# Altium PCB Read Time sensor Tho AMT.PcbDoc
Units mil, origin at the board's own origin, x right, y up, seen from the top; angles counter-clockwise.
Board outline 3641.73 x 3425.2 mil, 2 copper layers (Top Layer, Bottom Layer); 48 components, 35 nets, 162 pads, 86 vias.
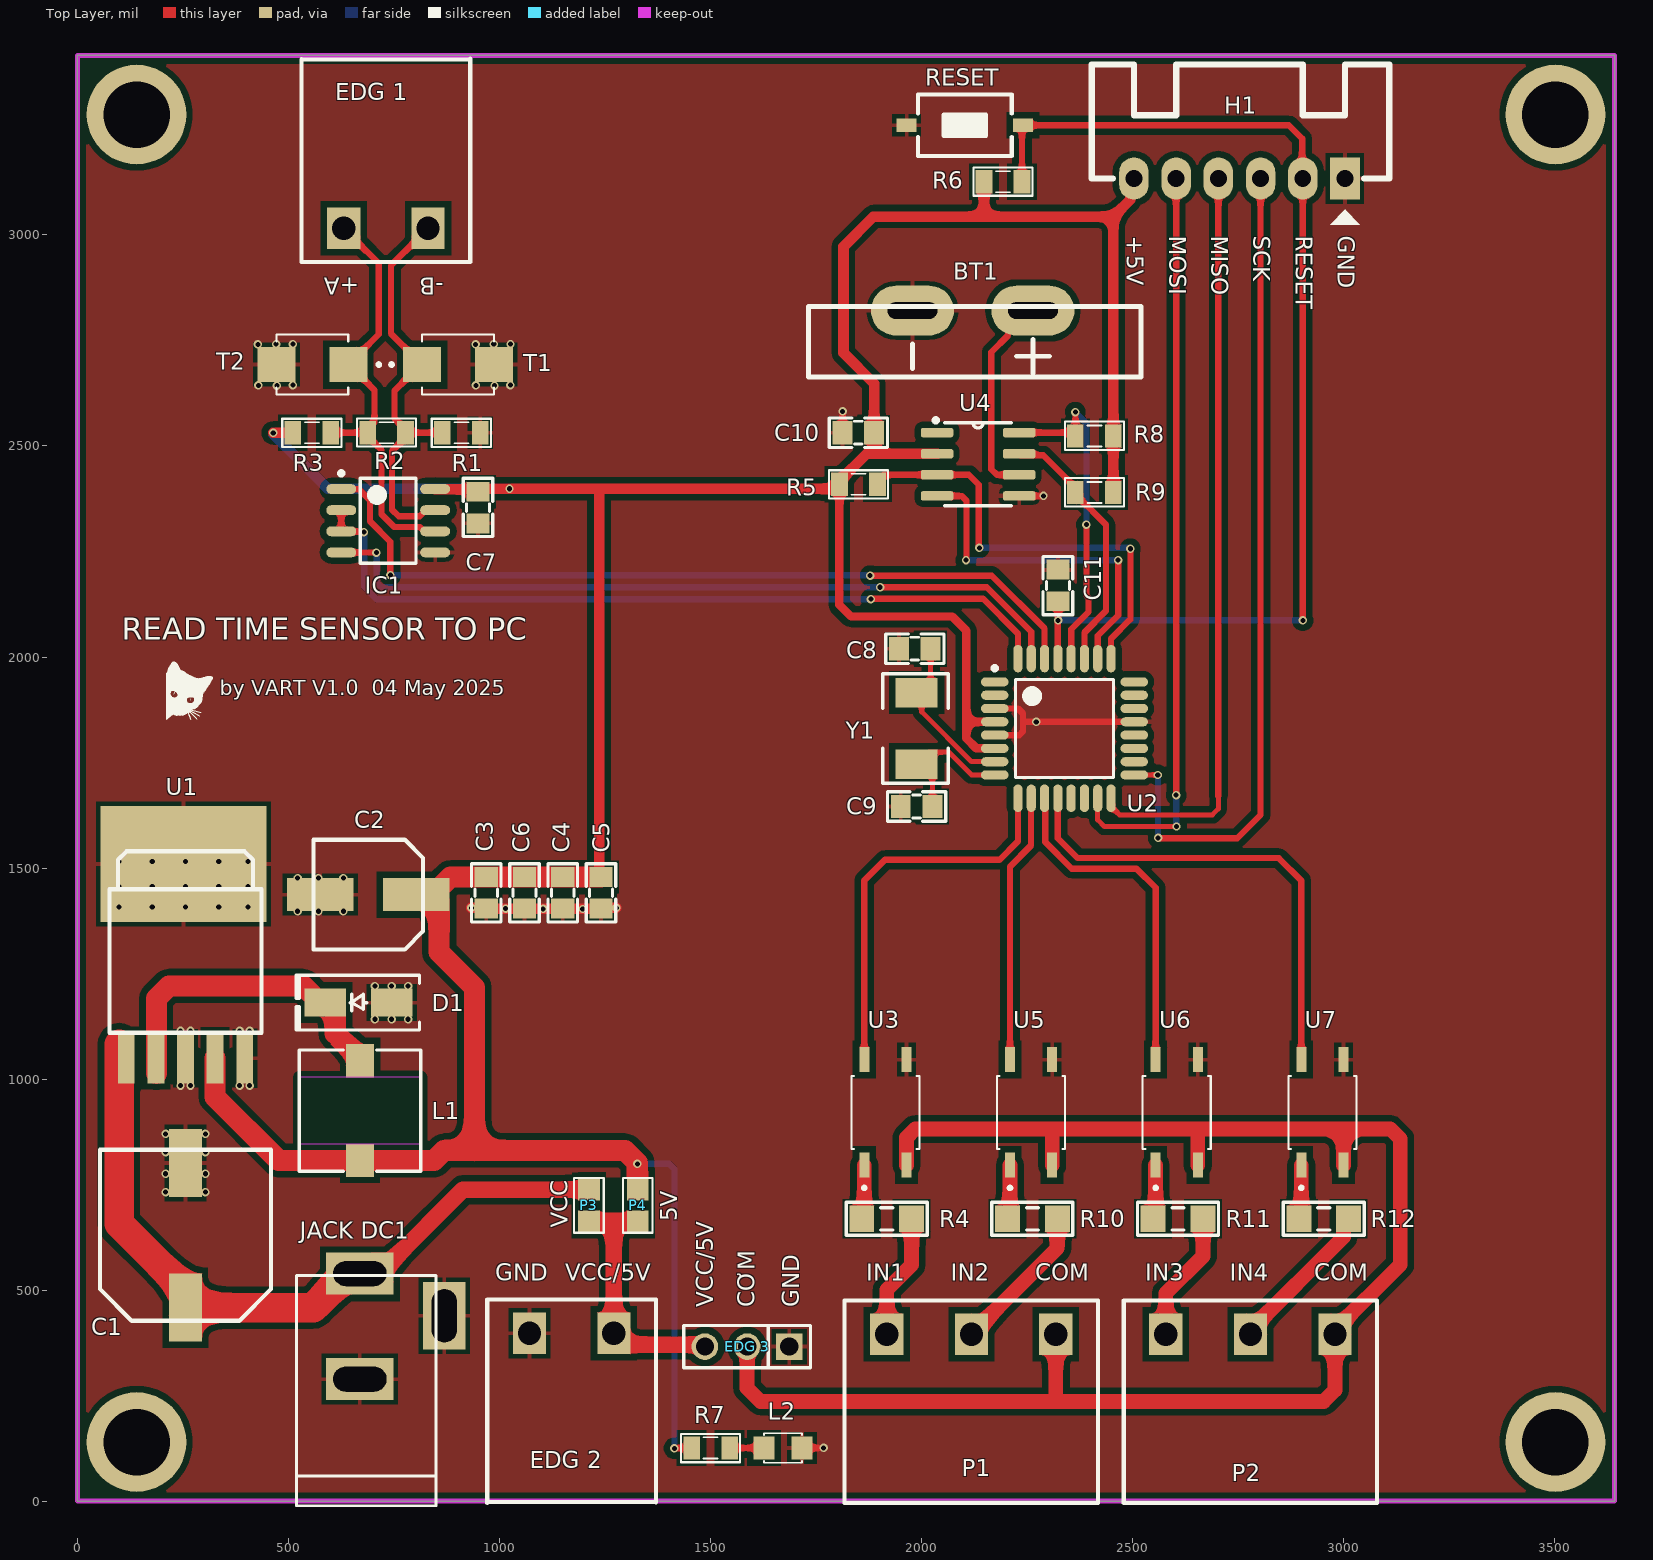
[diagram p0: Top Layer view]
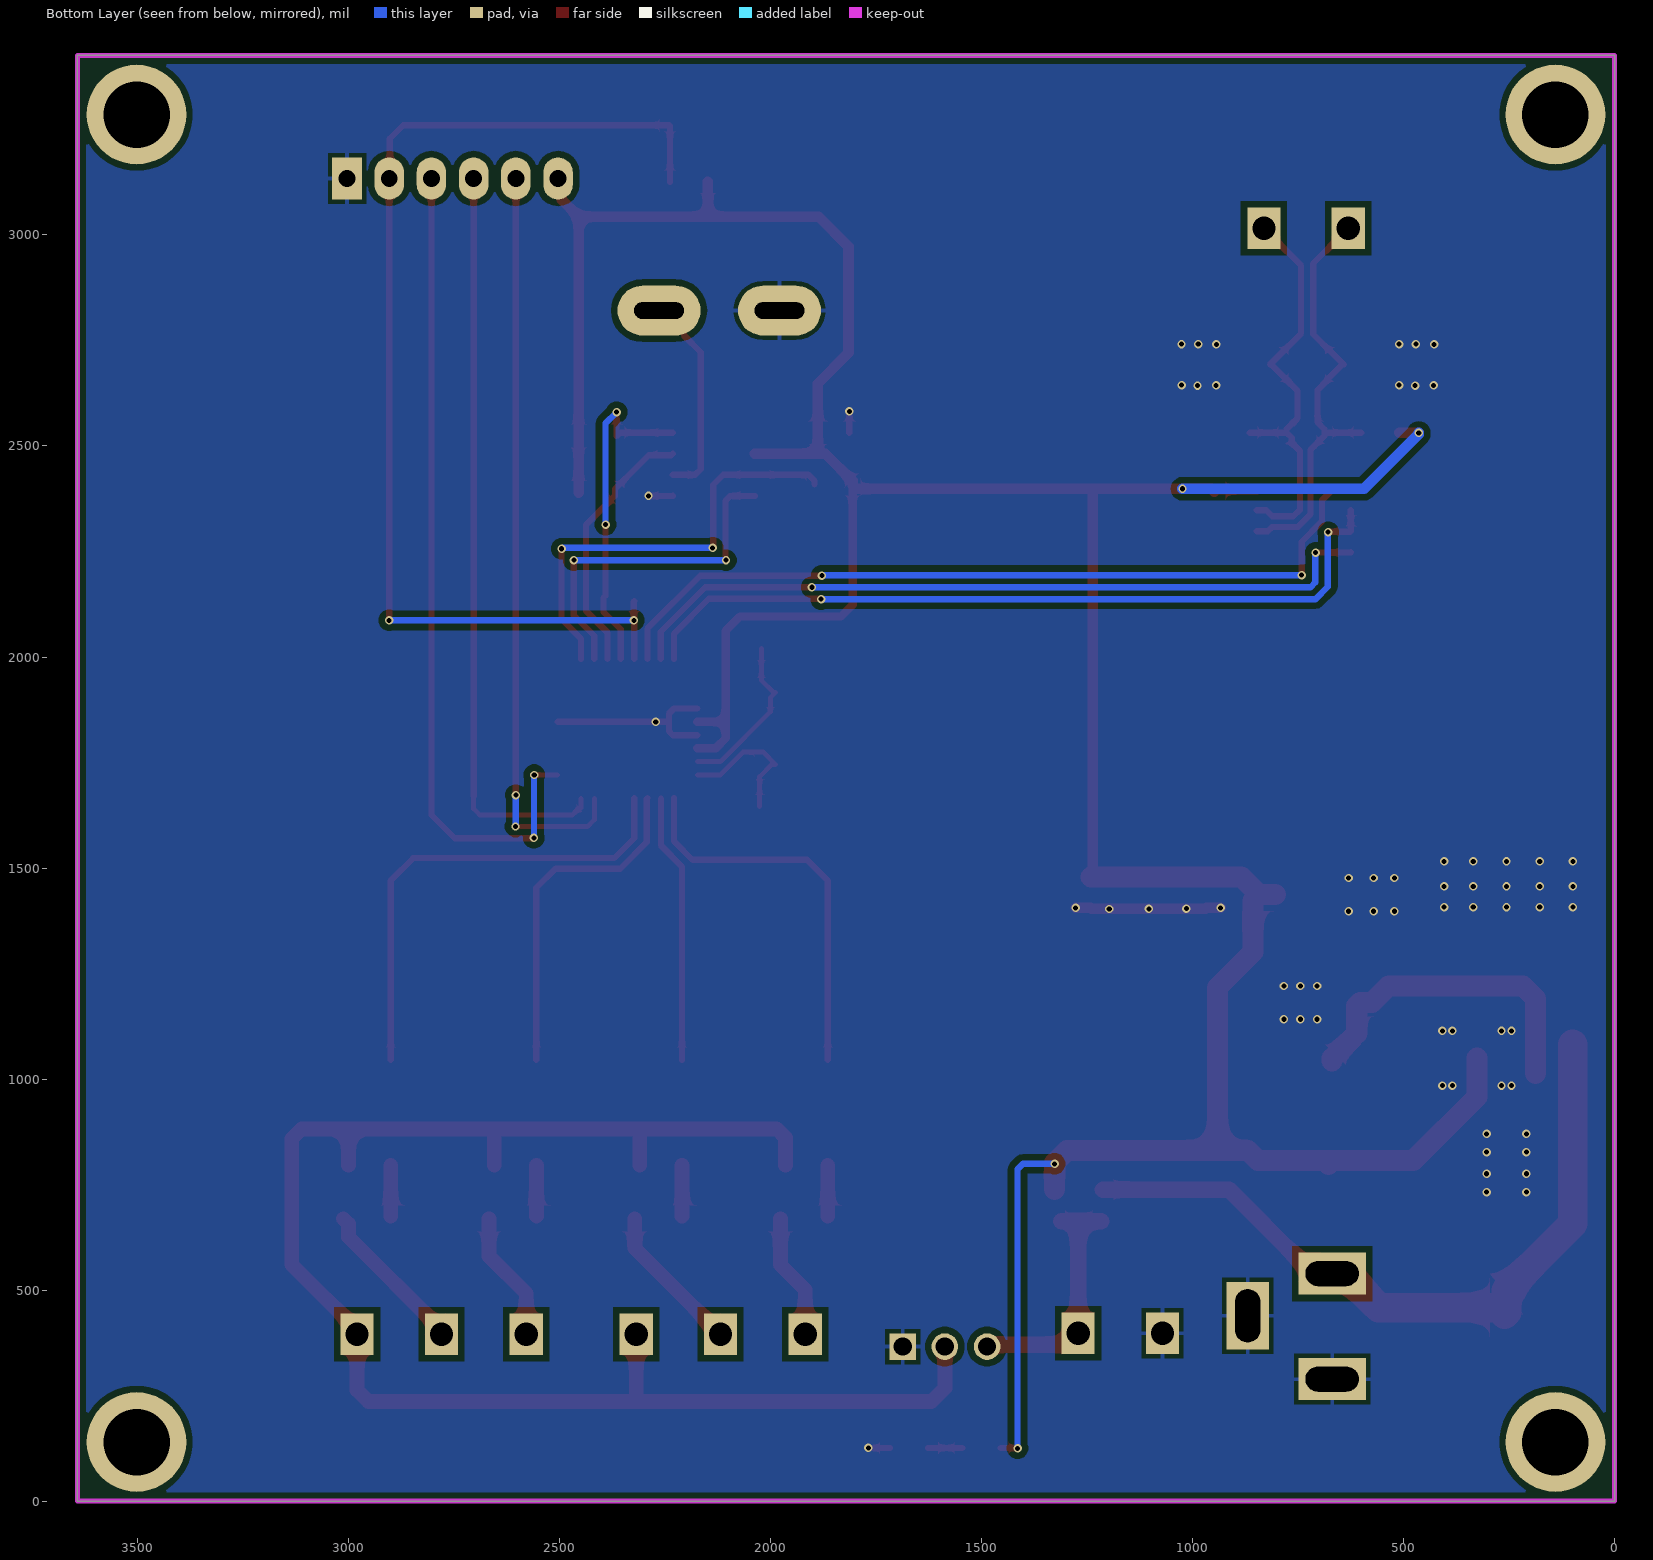
[diagram p1: Bottom Layer view, seen from below]

## Layer stack, top to bottom
Top Solder: solder mask 0.4, Solder Resist, Dk 3.5
Top Layer: signal copper 1.4
Dielectric 1: dielectric 12.6, FR-4, Dk 4.8
Bottom Layer: signal copper 1.4
Bottom Solder: solder mask 0.4, Solder Resist, Dk 3.5

## Board outline
0,0 3641.73,0 3641.73,3425.2 0,3425.2

## Design rules (kind name [scope] priority, off if disabled: settings)
Clearance [All] p1: gap=15 ignorepadtopadclearanceinfootprint=FALSE
PolygonConnect [All] p1: thpad.connectstyle=Relief thpad.reliefconductorwidth=10 thpad.reliefentries=4 thpad.polygonreliefangle="90 Angle" thpad.airgapwidth=10 smdpad.connectstyle=Relief smdpad.reliefconductorwidth=10 smdpad.reliefentries=4 smdpad.polygonreliefangle="90 Angle" smdpad.airgapwidth=10 via.connectstyle=Direct via.reliefconductorwidth=10 via.reliefentries=4 via.polygonreliefangle="90 Angle" via.airgapwidth=10
RoutingVias [All] p1: holewidth=12 width=20 viastyle="Through Hole" minholewidth=12 minwidth=20 maxholewidth=12 maxwidth=20
SolderMaskExpansion [All] p1: expansion=4 istentingtop=FALSE
Width [All] p1: maxlimit=78.74 minlimit=11.81 preferedwidth=19.68
30 further rules are at their usual default settings.

## Components (designator, comment, footprint, x,y, rotation, side; value= is the part's Value field where it differs from the comment)
BT1 "CR1220 SMD" "PIN 2032 DUNG" 2106.3,2732.28 r270 top
C1 "220uF/35V" "tu nhom 10 (g)" 255.91,629.92 r90 top
C2 "2200uF/16V" "tu nhom 6.3 (d)" 688.98,1437.01 r180 top
C3 "106" "tu 0805" 968.5,1440.94 r90 top
C4 "104" "tu 0805" 1149.61,1440.94 r90 top
C5 "104" "tu 0805" 1240.16,1440.94 r90 top
C6 "104" "tu 0805" 1059.05,1440.94 r90 top
C7 "104" "TU 0805" 948.82,2354.33 r270 top
C8 "22pF" "TU 0805" 1984.25,2019.69 r180 top
C9 "22pF" "TU 0805" 1988.19,1645.67 r180 top
C10 "104" "TU 0805" 1850.39,2531.5 r180 top
C11 "104" "TU 0805" 2322.83,2169.29 r90 top
D1 "SS34" "DIODE SMA" 665.35,1181.1 r180 top
"EDG 1" "RS485" "CON 2 2EDG5.08" 630.71,3015.75 r0 top
"EDG 2" "PWR SENSOR" "CON 2 2EDG5.08" 1270.87,397.64 r180 top
"EDG 3" "COM" "JP 1x3 DT" 1686.61,366.14 r180 top
H1 "NAP_AT8" "Header 6P DC 2.54" 3003.15,3133.86 r90 top
IC1 "MAX485" SO8 736.22,2322.83 r0 top
"JACK DC1" "JACK DC 5.5" "JACK DC 5.5" 769.08,414.04 r90 top value="Jac DC"
L1 "33uH 7.3x7.3x4.5mm" L-SMD-M-7.3x4.5 669.29,925.2 r0 top
L2 "LED 0805" LED-0805-Red 1626.54,125.98 r0 top
P1 "INPUT" "CON 3 3EDG5.08" 2318.11,395.64 r180 top
P2 "INPUT" "CON 3 3EDG5.08" 2979.24,395.64 r180 top
P3 "VCC" SMT-0805-RES 1211.83,700.79 r90 top
P4 "5V" SMT-0805-RES 1327.31,700.79 r90 top
R1 "10K" RES-SMD-0805 909.45,2531.5 r0 top
R2 "120R" RES-SMD-0805 732.28,2531.5 r180 top
R3 "10K" RES-SMD-0805 555.12,2531.5 r0 top
R4 "4k7/1206" "tro smd 1206" 1917.32,669.29 r180 top
R5 "10K" RES-SMD-0805 1850.39,2409.45 r0 top
R6 "10K" RES-SMD-0805 2192.91,3125.98 r180 top
R7 "2K" RES-SMD-0805 1500,125.98 r0 top
R8 "10k" RES-SMD-0805 2409.45,2523.62 r180 top
R9 "10k" RES-SMD-0805 2409.45,2389.76 r180 top
R10 "4k7/1206" "tro smd 1206" 2262.47,669.29 r180 top
R11 "4k7/1206" "tro smd 1206" 2607.61,669.29 r180 top
R12 "4k7/1206" "tro smd 1206" 2952.76,669.29 r180 top
RESET "Nut Nhan 2 Chan SMD 3x6x2.5" "Nut Nhan 2 Chan SMD 3x6x2.5" 2102.36,3259.84 r0 top (schematic designator RESET1)
T1 "TVS BMJ60" "TVS BMJ60" 901.57,2690.91 r0 top
T2 "TVS BMJ60" "TVS BMJ60" 556.5,2694.91 r180 top
U1 "LM2596S 5.0V SMD" TO263-5 255.91,1279.53 r0 top
U2 "ATmega328P-16AC" 32A_N 2338.58,1830.71 r0 top
U3 "OPTO EL354" "OPTO EL354" 1913.11,919.8 r90 top
U4 "DS3231MZ+" SOIC-8 2133.86,2456.69 r270 top
U5 "OPTO EL354" "OPTO EL354" 2258.27,919.8 r90 top
U6 "OPTO EL354" "OPTO EL354" 2603.43,919.8 r90 top
U7 "OPTO EL354" "OPTO EL354" 2948.58,919.8 r90 top
Y1 "16Mhz" "Thach Anh 2 chan SMD5032" 1988.19,1830.71 r90 top value=4Mhz

## Footprints (in the part's own frame and the unit in brackets; to place one, negate y for a bottom-side part, rotate by r counter-clockwise, add the part's x,y. Pads: shape width x height; smd on the part's side, far side on the other; paste and mask are expansions set on the pad)
32A_N [mm]
  oval 1.65x0.55 smd: 1(-4.2,2.8) 2(-4.2,2) 3(-4.2,1.2) 4(-4.2,0.4) 5(-4.2,-0.4) 6(-4.2,-1.2) 7(-4.2,-2) 8(-4.2,-2.8) 17(4.2,-2.8) 18(4.2,-2) 19(4.2,-1.2) 20(4.2,-0.4) 21(4.2,0.4) 22(4.2,1.2) 23(4.2,2) 24(4.2,2.8)
  oval 0.55x1.65 smd: 9(-2.8,-4.2) 10(-2,-4.2) 11(-1.2,-4.2) 12(-0.4,-4.2) 13(0.4,-4.2) 14(1.2,-4.2) 15(2,-4.2) 16(2.8,-4.2) 25(2.8,4.2) 26(2,4.2) 27(1.2,4.2) 28(0.4,4.2) 29(-0.4,4.2) 30(-1.2,4.2) 31(-2,4.2) 32(-2.8,4.2)
  silkscreen extent -4.32,-2.95 2.95,3.75, body extent -4.74,-4.86 4.86,4.74, height 1.13
"CON 2 2EDG5.08" [mm]
  rect 2x2.5 hole 1.4: 1(0,0) 2(5.08,0)
  silkscreen extent -2.54,-2.03 7.62,10.21, body extent -2.5,-1.75 7.58,10.25, height 3.15
"CON 3 3EDG5.08" [mm]
  rect 2x2.5 hole 1.4: 1(0,0) 2(5.08,0) 3(10.173,0)
  silkscreen extent -2.54,-2.03 12.71,10.16, body extent -2.5,-1.75 12.67,10.25, height 3.15
"DIODE SMA" [mm] "SMA"
  rect 2.5x1.7 smd: 1(-2,0) 2(2,0)
  silkscreen extent -3.68,-1.65 3.75,1.65, body extent -2.6,-1.37 2.6,1.37, height 2.4
"Header 6P DC 2.54" [mil]
  rect 100x70 hole 40: 1(0,0)
  oval 100x70 hole 40: 2(0,100) 3(0,200) 4(0,300) 5(0,400) 6(0,500)
  silkscreen extent -110,-105 270,600, body extent -7,-110 278,605, height 227
"JACK DC 5.5" [mil] "Jac DC input"
  rect 100x160 hole 59.06 slot 125.98 at 90 deg: 1(125,100) 2(-125,100)
  rect 160x100 hole 59.06 slot 125.98 at 0 deg: 3(25,-100)
  silkscreen extent -425,-80 120,250, body extent -410,-105 134,269, height 434
"JP 1x3 DT" [mm]
  rect 1.6x1.6 hole 1.1: 1(0,0)
  round 1.6 hole 1.1: 2(2.54,0) 3(5.08,0)
  silkscreen extent -1.27,-1.27 6.35,1.27, body extent -1.27,-1.27 6.35,1.27, height 8.54
L-SMD-M-7.3x4.5 [mm] "WE-PDA SMD Shielded Power Inductor, 7345"
  rect 1.7x2 smd: 1(0,3) 2(0,-3)
  Top Layer keep-out region: -3.65,-2 3.65,-2 3.65,2 -3.65,2
  silkscreen extent -3.65,-3.65 3.65,3.65, body extent -3.65,-3.65 3.65,3.65, height 4.05
LED-0805-Red [mil]
  rect 50x55 smd: 1(0,0) 2(90,0)
  silkscreen extent 0,-35 90,35, body extent 5,-25 85,25, height 43
"Nut Nhan 2 Chan SMD 3x6x2.5" [mm] "Switch SMD type"
  rect 1.2x0.8 smd: 1(-3.5,0) 2(3.5,0)
  silkscreen extent -2.82,-1.85 2.82,1.85, body extent -3.05,-1.85 3.05,1.85, height 2.5
"OPTO EL354" [mm]
  rect 1.5x0.6 smd: 1(-3.144,1.243) 2(-3.144,-1.297) 3(3.206,-1.297) 4(3.206,1.243)
  silkscreen extent -4.61,-2.08 2.23,2.02, body extent -3.47,-2.08 3.53,2.02, height 2
"PIN 2032 DUNG" [mm]
  oval 3x5 hole 1 slot 3 at 90 deg: 1(-2.25,4) 2(-2.25,-3.25)
  silkscreen extent -2.5,-9.5 1.75,10.5, body extent -2,-9.56 1.75,10.54, height 22.05
RES-SMD-0805 [mil]
  rect 39.37x55 smd: 1(-45,0) 2(45,0)
  silkscreen extent -70,-34 70,33, body extent -39,-25 39,25, height 31
SMT-0805-RES [mm] "Chip Resistor, 2-Leads, Body 2.05x1.25mm, IPC Medium Density"
  rect 1.3x1.3 smd: 1(-0.95,0) 2(0.95,0)
  silkscreen extent -1.65,-0.89 1.65,0.89, body extent -1.05,-0.65 1.05,0.65, height 0.5
SO8 [mm] "SOIC, 8-Leads, Body 4.9x3.9mm, Pitch 1.27mm, IPC High Density"
  oval 1.8x0.6 smd: 1(-2.825,1.905) 2(-2.825,0.635) 3(-2.825,-0.635) 4(-2.825,-1.905) 5(2.825,-1.905) 6(2.825,-0.635) 7(2.825,0.635) 8(2.825,1.905)
  silkscreen extent -2.95,-2.55 1.68,2.98, body extent -2.99,-2.45 3,2.45, height 1.6
SOIC-8 [mm] "SOIC-8"
  rrect49% 0.57x1.96 smd: 1(-1.905,-2.47) 2(-0.635,-2.47) 3(0.635,-2.47) 4(1.905,-2.47) 5(1.905,2.47) 6(0.635,2.47) 7(-0.635,2.47) 8(-1.905,2.47)
  silkscreen extent -2.77,-2.67 2.5,2, body extent -2.45,-3.08 2.45,2.92, height 1.63
"Thach Anh 2 chan SMD5032" [mil] "DO-214-AA/SMB; 2 C-Bend Leads; Body 5.3 x 3.6 mm, inc. leads (LxW)"
  rect 70x100 smd: 1(-85,0) 2(85,0)
  silkscreen extent -130,-75 130,80, body extent -98,-63 98,63, height 51
TO263-5 [mil] "TO263-5"
  rect 39.37x120 smd: 1(-140,-230) 2(-70,-230) 3(0,-230) 4(70,-230) 5(140,-230)
  rect 393.7x275.59 smd: 6(-5,230)
  silkscreen extent -180,-170 180,260, body extent -200,-242 200,310, height 180
"tro smd 1206" [mm]
  rect 1.5x1.6 smd: 1(-1.5,0) 2(1.5,0)
  silkscreen extent -2.44,-0.99 2.44,0.99, body extent -1.6,-0.8 1.6,0.8, height 0.6
"tu 0805" [mm] "Compoment SMD 80x50mil"
  rect 1.2x1.4 smd: 1(-0.946,-0.003) 2(0.954,-0.003)
  silkscreen extent -1.75,-0.89 1.75,0.89, body extent -1.01,-0.64 1.01,0.63, height 0.61
"TU 0805" [mm] "Compoment SMD 80x50mil"
  rect 1.2x1.4 smd: 1(-0.946,-0.003) 2(0.954,-0.003)
  silkscreen extent -1.75,-0.89 1.75,0.89, body extent -1.01,-0.64 1.01,0.63, height 0.61
"tu nhom 6.3 (d)" [mm]
  rect 4x2 smd: 1(-2.9,0) 2(2.9,0)
  silkscreen extent -3.3,-3.3 3.3,3.3, body extent -3.8,-3.3 3.8,3.3, height 8
"tu nhom 10 (g)" [mm]
  rect 4.1x2 smd: 1(-4.35,0) 2(4.35,0)
  silkscreen extent -5.15,-5.15 5.15,5.15, body extent -5.9,-5.25 5.9,5.25, height 10.5
"TVS BMJ60" [mm]
  rect 2.28x2.12 smd: A(2.165,0.051) C(-2.165,0.051)
  silkscreen extent -4.1,-1.76 2.16,1.86, body extent -2.67,-1.76 2.67,1.86, height 2.65

## Part data
BT1: library part "De pin CR1220 SMD", Ma_Hang=MH000833, Ten="Đế PIN CR1220 SMD"
C1: library part "Tu Nhom 220uF 50V", "Dán 35V", Chung_Loai=Dán, Don_Vi=Con, Ma_Hang=MH002228, So_Chan=2, Ten_Linh_Kien="Tụ Nhôm 220uF 50V 10x10.2MM"
C2: library part "Tu Nhom 10uF 20V", "Dán", Chung_Loai=Dán, Don_Vi=Con, Ma_Hang=MH004016, So_Chan=2, Ten_Linh_Kien="Tụ Nhôm 10uF 20V"
C3 C4 C5 C6: library part "Tu 0805 105 50V 10%", "Dán", Chung_Loai=Dán, Don_Vi=Con, Ma_Hang=MH004552, So_Chan=2, Ten_Linh_Kien="Tụ 0805 105-1uF 10% 50V"
C7 C10: library part "Tu 0805 104 50V 10%", "Dán", Chung_Loai=Dán, Don_Vi=Con, Ma_Hang=MH004551, So_Chan=2, Ten_Linh_Kien="Tụ 0805 104-100nF 10% 50V"
C8 C9 C11: library part "TU 0805"
D1: library part "Diode SS14 ( 1N5819)", "Dán", Chung_Loai=Dán, Don_Vi=Con, Ma_Hang=MH002211, Ten_Linh_Kien="Diode SS14 DO214 Schottky 1A 40V ( 1N5819 DO214)"
"EDG 1" "EDG 2": library part "CON 2 EDG5.08", "Cắm", Chung_Loai=Cắm, Don_Vi=Con, Ma_Hang=MH000759, Ten_Linh_Kien="CON 2 2EDG5.08-2P 5.08MM ( Xanh Cong)"
"EDG 3": library part "JP 1x3 2.54 Duc Thang", "Cắm", Chung_Loai=Cắm, Don_Vi=Con, Ma_Hang=MH000903, Ten_Linh_Kien="Jump Đơn Đực 2.54MM 1x40P Thẳng 11MM"
H1: library part "Header 6P 2.54 Duc Cong", "Cắm", Chung_Loai=Cắm, Don_Vi=Con, Ma_Hang=MH003363, Ten_Linh_Kien="Header 6P XH2.54-6P Đực Cong"
IC1: "RS232 - RS485 (Same sn75176)"
L1: library part L-SMD-1, Inductance="1.0 μH", Manufacturer="Wurth Elektronik", partNo=78477010, ComponentLink1Description=Manufacturer, ComponentLink1URL=http://www.we-online.de, ComponentLink2Description=Datasheet, ComponentLink2URL=http://katalog.we-online.de/pbs/datasheet/78477010.pdf, Created by="Baojun Chen", Created Date=Nov.2015
L2: library part "LED 0805 Do", "Dán", Chung_Loai=Dán, Don_Vi=Con, Ma_Hang=MH000897, Ten_Linh_Kien="LED 0805 Màu Đỏ (Red)"
P1 P2: library part "CON 3 EDG5.08", "Cắm", Chung_Loai=Cắm, Don_Vi=Con, Ma_Hang=MH000760, Ten_Linh_Kien="CON 3 2EDG5.08-3P 5.08MM ( Xanh Cong)"
P3 P4: library part "Pad han noi 2 duong"
R1 R2 R3 R5 R6 R7 R8 R9: library part Res-SMD, "Resistor", Manufacturer="Generic Components", Class=Passive, Published=08/06/2000, Publisher="Altium Hobart Technology Centre"
R4 R10 R11 R12: library part "Tro 0805 5% 10k", "Dán", Chung_Loai=Dán, Don_Vi=Con, Ma_Hang=MH005239, So_Chan=2, Ten_Linh_Kien="Trở 0805 5% 10k"
U1: library part "LM2576HVS 5.0V SMD", "Dán", Chung_Loai=Dán, Don_Vi=Con, Ma_Hang=MH002362, Ten_Linh_Kien="LM2576HVS-5.0V BUCK 5V 3A TO263-5"
U2: library part ATmega8-16AC, "8-Bit AVR Microcontroller with 8K Bytes of In-System Programmable Flash Memory", Supplier Part Number 1=ATMEGA8-16AC-ND, Code_JEDEC=MS-026-ABA, ComponentLink1Description=Datasheet, ComponentLink1URL=http://www.atmel.com/dyn/resources/prod_documents/doc2486.pdf, ComponentLink2Description="Atmel.com Home", ComponentLink2URL=http://www.atmel.com, DatasheetVersion=2486H-AVR-09/02, LatestRevisionDate=16-Oct-2006, LatestRevisionNote="IPC-7351 Footprint Added.", PackageDescription="32-Lead, 7x7x1.0 mm Body, 0.8mm Lead Pitch, Thin Profile Plastic Quad Flat Package (TQFP)", PackageReference=32A, PackageVersion="revB, Oct-2001", Published=17-Sep-2003, Publisher="Altium Limited", Supplier 1=Digi-Key, Supplier 2=Mouser, Supplier Part Number 2=556-ATMEGA8-16AC
U4: Package="SOIC-8 Maxim", Check_prices=https://www.snapeda.com/parts/DS3231MZ+/Analog+Devices/view-part/?ref=eda, MF="Analog Devices", MP=DS3231MZ+, SnapEDA_Link=https://www.snapeda.com/parts/DS3231MZ+/Analog+Devices/view-part/?ref=snap
Y1: library part "Thach Anh 2 chan SMD 5032", "Crystal For all Crystal 2pin."
RESET: Ma_Hang=MH001036, Ten="Nút Nhấn 2 Chân 3x6x2.5MM SMD"

## Free pads (board coordinates)
  round 236.22 hole 157.48: 2(140,140) 2(140,3285.2) 2(3501.73,140) 2(3501.73,3285.2)

## Via types
v1: diameter 20, hole 12, Top Layer to Bottom Layer, tented both sides, 60 vias
v2: diameter 20, hole 12, Top Layer to Bottom Layer, 26 vias

## Nets (pads, with @x,y where several pads share a name; then routed paths per layer and width w, separated by ;. In a path a pad name is that pad's centre, name@x,y a point inside that pad or via, vN(x,y) a via of type N, cw(c..) or ccw(c..) an arc to the next point about the centre after c; other vN are vias at no path point)
+5: C2.1 C3.2 C4.2 C5.2 C6.2 C7.1 C10.1 H1.6 IC1.8 L1.2 P4.2 R3.1 R5.1 R6.2 R7.1 R8.1 R9.1 U1.4 U2.4 U2.6 U4.2 | length 9036.4
  Top Layer w15: v2(1414.42,124.95) 1413.39,125.98 R7.1
  Top Layer w20: R5.1 1805.39,2405.78 1805.39,2123.46 1832.86,2096 2072.55,2096 2106.3,2062.25 2106.3,1846.46 ; U2.6 2172.91,1783.78 2129.6,1783.78 2106.3,1807.09 2106.3,1846.46 ; U2.4 2106.3,1846.46
  Top Layer w25: v2(463.82,2531.16) 509.78,2531.16 R3.1 ; IC1.8 848.13,2397.15 943.1,2397.15 C7.1 955.72,2398.59 v2(1023.62,2398.59) ; 1043.31,2398.59 v2(1023.62,2398.59) ; C5.2 1236.06,1482.75 1236.06,2398.59 ; R5.1@1805.39,2405.78 1798.21,2398.59 1236.06,2398.59 ; R5.1 1805.39,2417.26 1869.82,2481.69 U4.2 ; 1887.62,2481.69 C10.1 1887.62,2647.81 1814.96,2720.47 1814.96,2972.44 1885.83,3043.31 2147.91,3043.31 ; R6.2 2147.91,3043.31 ; R9.1 R8.1 2454.45,3043.31 ; H1.6 2494.54,3125.25 2494.54,3083.4 2454.45,3043.31 ; v2(1023.62,2398.59) 1236.06,2398.59 ; 2147.91,3043.31 2454.45,3043.31
  Top Layer w50: U1.4 325.91,957.95 476.77,807.09 L1.2 ; L1.2@677.76,797.24 669.29,805.71 L1.2 ; C2.1 C2.1@842.52,1437.01 ; C5.2 C4.2 C6.2 C3.2 884.03,1478.52 C2.1@842.52,1437.01 ; P4.2 1326.72,738.78 1326.72,801.47 1297.43,830.76 940.23,830.76 ; L1.2 845.02,807.09 868.7,830.76 940.23,830.76 ; C2.1@842.52,1437.01 856.89,1422.64 856.89,1300.59 940.23,1217.25 940.23,830.76
  Bottom Layer w15: v2(1326.77,799.21) 1401.57,799.21 1414.42,786.36 v2(1414.42,124.95)
  Bottom Layer w25: v2(463.82,2531.16) 463.82,2528.31 593.53,2398.59 v2(1023.62,2398.59)
+24V: "JACK DC1.1" C1.1 P3.2 U1.1 | length 1778.5
  Top Layer w39.37: 669.08,539.04 699.4,569.35 744.59,569.35 913.43,738.19 P3.2
  Top Layer w70: U1.1@98.43,1082.68 98.43,657.48 255.91,500 C1.1 ; C1.1@260.28,442.91 255.91,447.28 C1.1 ; 669.08,539.04 639.08,539.04 558.71,458.66 C1.1
+A: "EDG 1.1" IC1.6 R2.2 R3.2 T2.C | length 1020.7
  Top Layer w15: R3.2 R2.2 ; 630.71,3015.75 713.92,2932.54 713.92,2765.1 T2.C 644.88,2692.91 679.11,2658.68 679.11,2657.03 703.52,2632.63 703.52,2555.54 687.29,2539.31 R2.2 ; IC1.6 821.49,2297.83 811.16,2308.16 750.47,2308.16 720.31,2338.32 720.31,2490.65 687.29,2523.68 R2.2
-B: "EDG 1.2" IC1.7 R1.1 R2.1 T1.C | length 988.8
  Top Layer w15: 830.71,3015.75 742.64,2927.68 742.64,2766.61 T1.C 813.19,2692.91 751.09,2630.82 751.09,2565.5 777.29,2539.31 R2.1 ; IC1.7 825.4,2347.83 810.72,2333.16 760.83,2333.16 745.31,2348.67 745.31,2488.03 765.1,2507.81 765.1,2519.31 R2.1 ; R1.1 R2.1
COM: "EDG 3.2" P1.1 P2.1 U3.2 U5.2 U6.2 U7.2 | length 3846.2
  Top Layer w35: 1586.61,366.14 1586.61,267.72 1618.11,236.22 2952.76,236.22 2979.24,262.7 P2.1 2979.24,405.48 3133.86,560.1 3133.86,858.27 3110.24,881.89 2999.65,881.89 ; U3.2 1964.17,861.39 1984.68,881.89 2311.02,881.89 ; U5.2 2309.33,880.2 2311.02,881.89 ; 2318.11,237.01 P1.1 ; U6.2 2654.49,878.9 2657.48,881.89 ; U7.2 2999.65,881.89 ; 2311.02,881.89 2657.48,881.89 ; 2657.48,881.89 2999.65,881.89
DE: IC1.2 IC1.3 U2.32 | length 1887.8
  Top Layer w15: IC1.2 IC1.3 626.1,2296.74 677.48,2296.74 v2(678.43,2295.78) ; v2(1879.94,2137.2) 1880.54,2137.8 2145.67,2137.8 2228.35,2055.12 U2.32
  Bottom Layer w15: v2@679.15,2295.06 679.15,2166.42 708.37,2137.2 v2(1879.94,2137.2)
GND: "EDG 2.2" "EDG 3.1" "JACK DC1.2" "JACK DC1.3" BT1.2 C1.2 C2.2 C3.1 C4.1 C5.1 C6.1 C7.2 C8.2 C9.2 C10.2 C11.2 D1.1 H1.1 IC1.5 L2.2 R1.2 RESET.1 T1.A T2.A U1.3 U1.5 U1.6 U2.3 U2.5 U2.21 U3.3 U4.5 U5.3 U6.3 U7.3 | length 954.3
  Top Layer w15: L2.2 v2(1767.72,125.98) ; C10.2 1813.02,2531.83 v2(1813.02,2582.21) ; U2.5 2231.37,1814.96 2240.16,1823.75 2240.16,1844.94 ; U2.3 2228.35,1877.95 2240.16,1866.14 2240.16,1844.94 ; U4.5 v2(2288.83,2381.67) ; U2.21 v2(2271.65,1846.46) 2241.67,1846.46 2240.16,1844.94
  Top Layer w25: v1(933.07,1405.51) 966.84,1405.51 C3.1 C6.1 C4.1 C5.1 1242.09,1405.51 1276.99,1405.51 v1(1276.93,1405.58)
  other v1: 208.66,732.28 303.15,732.28 208.66,775.59 303.15,775.59 208.66,826.77 303.15,826.77 208.66,870.08 303.15,870.08 244.09,984.25 267.72,984.25 384.09,984.25 407.72,984.25 244.09,1114.17 267.72,1114.17 384.09,1114.17 407.72,1114.17 704.72,1141.73 744.09,1141.73 783.46,1141.73 704.72,1220.47 744.09,1220.47 783.46,1220.47 521.65,1397.64 570.87,1397.64 629.92,1397.64 1103.33,1403.1 1197.09,1402.87 1014.2,1403.75 98.43,1407.48 177.17,1407.48 255.91,1407.48 334.65,1407.48 403.54,1407.48 98.43,1456.69 177.17,1456.69 255.91,1456.69 334.65,1456.69 403.54,1456.69 521.65,1476.38 570.87,1476.38 629.92,1476.38 98.43,1515.75 177.17,1515.75 255.91,1515.75 334.65,1515.75 403.54,1515.75 428.36,2643.38 472.52,2642.99 943.91,2643.38 988.08,2642.99 510.18,2644.15 1025.73,2644.15 427.59,2740.66 470.78,2741.36 510.44,2741.32 943.15,2740.66 986.33,2741.36 1025.99,2741.32
IN1: P1.3 R4.1 | length 298
  Top Layer w35: P1.3 1917.61,501 1976.38,559.77 R4.1
IN2: P1.2 R10.1 | length 363.7
  Top Layer w35: P1.2 2118.11,405.48 2139.98,427.35 2149.82,427.35 2321.52,599.05 R10.1
IN3: P2.3 R11.1 | length 310.1
  Top Layer w35: P2.3 2578.74,492.13 2666.67,580.05 R11.1
IN4: P2.2 R12.1 | length 370
  Top Layer w35: P2.2 2779.24,405.48 2999.78,626.02 2999.78,657.26 R12.1
K_IN1: U2.9 U3.4 | length 929.1
  Top Layer w15: U3.4 1864.17,1470.47 1913.39,1519.68 2184.74,1519.68 2228.35,1563.29 U2.9
K_IN2: U2.10 U5.4 | length 639.3
  Top Layer w15: U5.4 2209.33,1503.41 2259.18,1553.26 U2.10@2259.18,1664.69
K_IN3: U2.11 U6.4 | length 818.3
  Top Layer w15: U2.11 2292.61,1664.08 2292.61,1561.72 2355.71,1498.62 2509.25,1498.62 2554.49,1453.38 U6.4
K_IN4: U2.12 U7.4 | length 1137.3
  Top Layer w15: U2.12 2322.83,1570.87 2370.08,1523.62 2846.46,1523.62 2899.65,1470.43 U7.4
MISO: H1.4 U2.16 | length 1784.1
  Top Layer w11.81: U2.16 2448.82,1641.73 2448.9,1641.82 2453.37,1641.82 2469.2,1625.98 2688.98,1625.98 2703.15,1640.16 2703.15,1670.87
  Top Layer w15: 2703.15,1670.87 H1.4
MOSI: H1.5 U2.15 | length 1784.4
  Top Layer w11.81: U2.15 2417.32,1614.17 2433.07,1598.43 v2(2603.94,1598.43) v2@2606.3,1598.43
  Top Layer w15: H1.5 v2(2603.15,1672.53) v2@2604.5,1671.18
  Bottom Layer w15: v2(2603.15,1672.53) 2603.15,1599.21 v2(2603.94,1598.43)
NetBT1_1: BT1.1 U4.6 | length 494.7
  Top Layer w15: U4.6 2178.54,2431.69 2165.35,2444.88 2165.35,2722.44 2204.68,2761.77 2204.68,2773.24 2252.31,2820.87 BT1.1
NetD1_2: D1.2 L1.1 U1.2 | length 786.6
  Top Layer w50: U1.2@187.01,1013.78 187.01,1190.94 216.54,1220.47 535.43,1220.47 574.8,1181.1 D1.2 602.36,1181.1 610.83,1172.64 610.83,1107.68 669.29,1049.21 L1.1
"NetEDG 2_1": "EDG 2.1" "EDG 3.3" P3.1 P4.1 | length 593.3
  Top Layer w39.37: P3.1@1216.54,663.39 1270.87,663.39 ; P4.1@1311.02,663.39 1270.87,663.39 ; 1486.61,366.14 1482.09,370.66 1290.55,370.66 1270.87,390.35 1270.87,397.64 1270.87,663.39
NetL2_1: L2.1 R7.2 | length 81.5
  Top Layer w15: R7.2 L2.1
NetR4_2: R4.2 U3.1 | length 120.8
  Top Layer w35: R4.2@1864.17,675.24 U3.1
NetR10_2: R10.2 U5.1 | length 120.8
  Top Layer w35: R10.2@2209.33,675.24 U5.1
NetR11_2: R11.2 U6.1 | length 120.8
  Top Layer w35: R11.2@2554.49,675.24 U6.1
NetR12_2: R12.2 U7.1 | length 120.8
  Top Layer w35: R12.2@2899.65,675.24 U7.1
RESET: C11.1 H1.2 R6.1 RESET.2 U2.29 | length 2667.8
  Top Layer w15: R6.1 2237.91,3257.6 RESET.2 2870.08,3259.84 2901.57,3228.35 2901.57,3135.43 2903.16,3133.85 v2(2903.17,2086.86) ; U2.29 v2@2322.83,2087.28 ; C11.1 2323.4,2131.63 v2(2323.4,2086.85)
  Bottom Layer w15: v2@2323.41,2086.86 v2(2903.17,2086.86)
RST_RTC: U2.26 U4.4 | length 831.5
  Top Layer w15: U4.4@2036.69,2381.62 2094.76,2381.62 2106.3,2370.08 2106.3,2228.35 v2(2105.2,2229.44) ; U2.26 2417.32,2050.32 2465.67,2098.67 v2(2465.67,2229.44)
  Bottom Layer w15: v2(2105.2,2229.44) v2(2465.67,2229.44)
RX_485: IC1.1 U2.30 | length 1950.4
  Top Layer w15: IC1.1 625.27,2397.56 666.87,2397.56 693.07,2371.36 693.07,2321.55 741.31,2273.32 v2(741.31,2193.88) ; v2(1877.95,2192.91) 2166.01,2192.91 2291.34,2067.59 U2.30
  Bottom Layer w15: v2(741.31,2193.88) 1875.63,2193.88 1876.6,2192.91 v2(1877.95,2192.91)
SCK: H1.3 U2.17 | length 1977.4
  Top Layer w11.81: U2.17 v2(2559.45,1720.47)
  Top Layer w15: v2(2560.4,1571.3) 2560.84,1570.87 2748.03,1570.87 2803.15,1625.98 H1.3
  Bottom Layer w15: v2@2559.45,1719.12 2559.93,1718.64 2559.93,1571.78 v2(2560.4,1571.3)
SCL: R8.2 U2.28 U4.8 | length 807.7
  Top Layer w15: U4.8 2356.38,2531.69 R8.2 v2(2364.45,2580.35) ; U2.28 2354.33,2065.53 2395.63,2106.83 2395.63,2140.21 2390.62,2145.22 v2(2390.62,2313.59)
  Bottom Layer w15: v2(2364.45,2580.35) 2390.62,2554.19 2390.62,2422.75 v2(2390.62,2313.59)
SDA: R9.2 U2.27 U4.7 | length 623.3
  Top Layer w15: U4.7 2234.82,2477.97 2287.99,2477.97 2368.39,2397.58 2368.39,2389.76 2368.39,2381.95 2437.01,2313.33 2437.01,2109.19 2385.83,2058.01 U2.27
SQW: R5.2 U2.25 U4.3 | length 1052
  Top Layer w15: R5.2 1895.39,2417.26 1909.82,2431.69 U4.3 2111.88,2431.69 2135.76,2407.81 2135.76,2259.54 v2(2136.68,2258.62) ; U2.25 2448.82,2043.46 2494.76,2089.41 v2(2494.76,2256.49)
  Bottom Layer w15: v2(2136.68,2258.62) 2491.28,2258.62 2493.41,2256.49 v2(2494.76,2256.49)
TX_485: IC1.4 U2.31 | length 1817.6
  Top Layer w15: IC1.4 625.24,2247.6 707.82,2247.6 v2(708.06,2247.36) ; v2(1901.57,2165.35) 2154.6,2165.35 2259.84,2060.11 U2.31
  Bottom Layer w15: v2(708.06,2247.36) 708.78,2246.64 708.78,2176.73 720.1,2165.41 1901.52,2165.41 v2(1901.57,2165.35)
XTAL1: C8.1 U2.7 Y1.2 | length 393
  Top Layer w11.81: C8.1 2021.48,1944.8 1992.39,1915.71 Y1.2 2000.17,1903.73 2000.17,1869.91 2118.11,1751.97 U2.7
XTAL2: C9.1 U2.8 Y1.1 | length 339.6
  Top Layer w11.81: C9.1 2025.42,1716.61 1996.32,1745.71 Y1.1 2017.23,1774.75 2064.49,1774.75 2118.76,1720.47 U2.8
pads on no net: U2.1 U2.2 U2.13 U2.14 U2.18 U2.19 U2.20 U2.22 U2.23 U2.24 U4.1

## Polygon pours and split planes (outlines as drawn)
GND on Top Layer "GND_L01_P000" (solid, pour order 0): 0,3425.2 0,0 3641.73,0 3641.73,3425.2
GND on Bottom Layer "GND_L02_P001" (solid, pour order 1): 0,3425.2 0,0 3641.73,0 3641.73,3425.2

## Keep-outs
Keep-Out Layer:
  the board outline again, w11.81

## Other copper
Top Layer:
  pour cut-out: 1181.1,767.72 1346.46,767.72 1346.46,633.86 1181.1,633.86

## Silkscreen, mask and mechanical layers (free items; w line width, h text height)
Top Overlay:
  region: 3909 vertices and 2 holes, not listed, extent 209.72,1851.36 320.35,1989.35
  text "+5V" at 2486.38,2997.87 h40 r270
  text "MOSI" at 2586.38,2997.87 h40 r270
  text "MISO" at 2686.38,2997.87 h40 r270
  text "SCK" at 2786.38,2997.87 h40 r270
  text "RESET" at 2886.39,2997.86 h40 r270
  text "GND" at 2986.38,2997.87 h40 r270
  text "+A" at 667.42,2898.66 h40 r180
  text "-B" at 867.95,2898.66 h40 r180
  text "READ TIME SENSOR TO PC" at 104.75,2022.9 h90
  text "by VART V1.0  04 May 2025" at 336.49,1897.96 h60
  text "GND" at 990.32,521.81 h40
  text "VCC/5V" at 1155.67,521.81 h40
  text "IN1" at 1868.27,521.81 h40
  text "IN2" at 2068.77,521.81 h40
  text "COM" at 2268.77,521.81 h40
  text "IN3" at 2529.4,521.81 h40
  text "IN4" at 2729.9,521.81 h40
  text "COM" at 2929.9,521.81 h40
  text "VCC/5V" at 1505.75,458.82 h40 r90
  text "CƠM" at 1604.17,458.82 h40 r90
  text "GND" at 1710.47,458.82 h40 r90
Mechanical 13:
  lines w19.68: 0,295.28 0,314.96 472.44,314.96 472.44,0 ; 0,3110.24 472.44,3110.24 ; 3169.29,0 3169.29,314.96 3641.73,314.96 ; 3169.29,3425.2 3169.29,3110.24 3641.73,3110.24 ; 472.44,3110.24 472.44,3425.2 ; 472.44,3110.24 472.44,3425.2 ; 472.44,3110.24 472.44,3425.2 ; 3641.73,0 3641.73,3425.2 ; 3641.73,0 0,0 0,3425.2 3523.62,3425.2 3641.73,3425.2 ; 3641.73,0 3641.73,3425.2